# Altium PCB PM-1_PBD.PcbDoc
Units mm, origin at the board's own origin, x right, y up, seen from the top; angles counter-clockwise.
Board outline 87 x 116 mm, 2 copper layers (Top Layer, Bottom Layer); 78 components, 20 nets, 139 pads, 499 vias.
Unrouted connection lines stored in the file: 26.
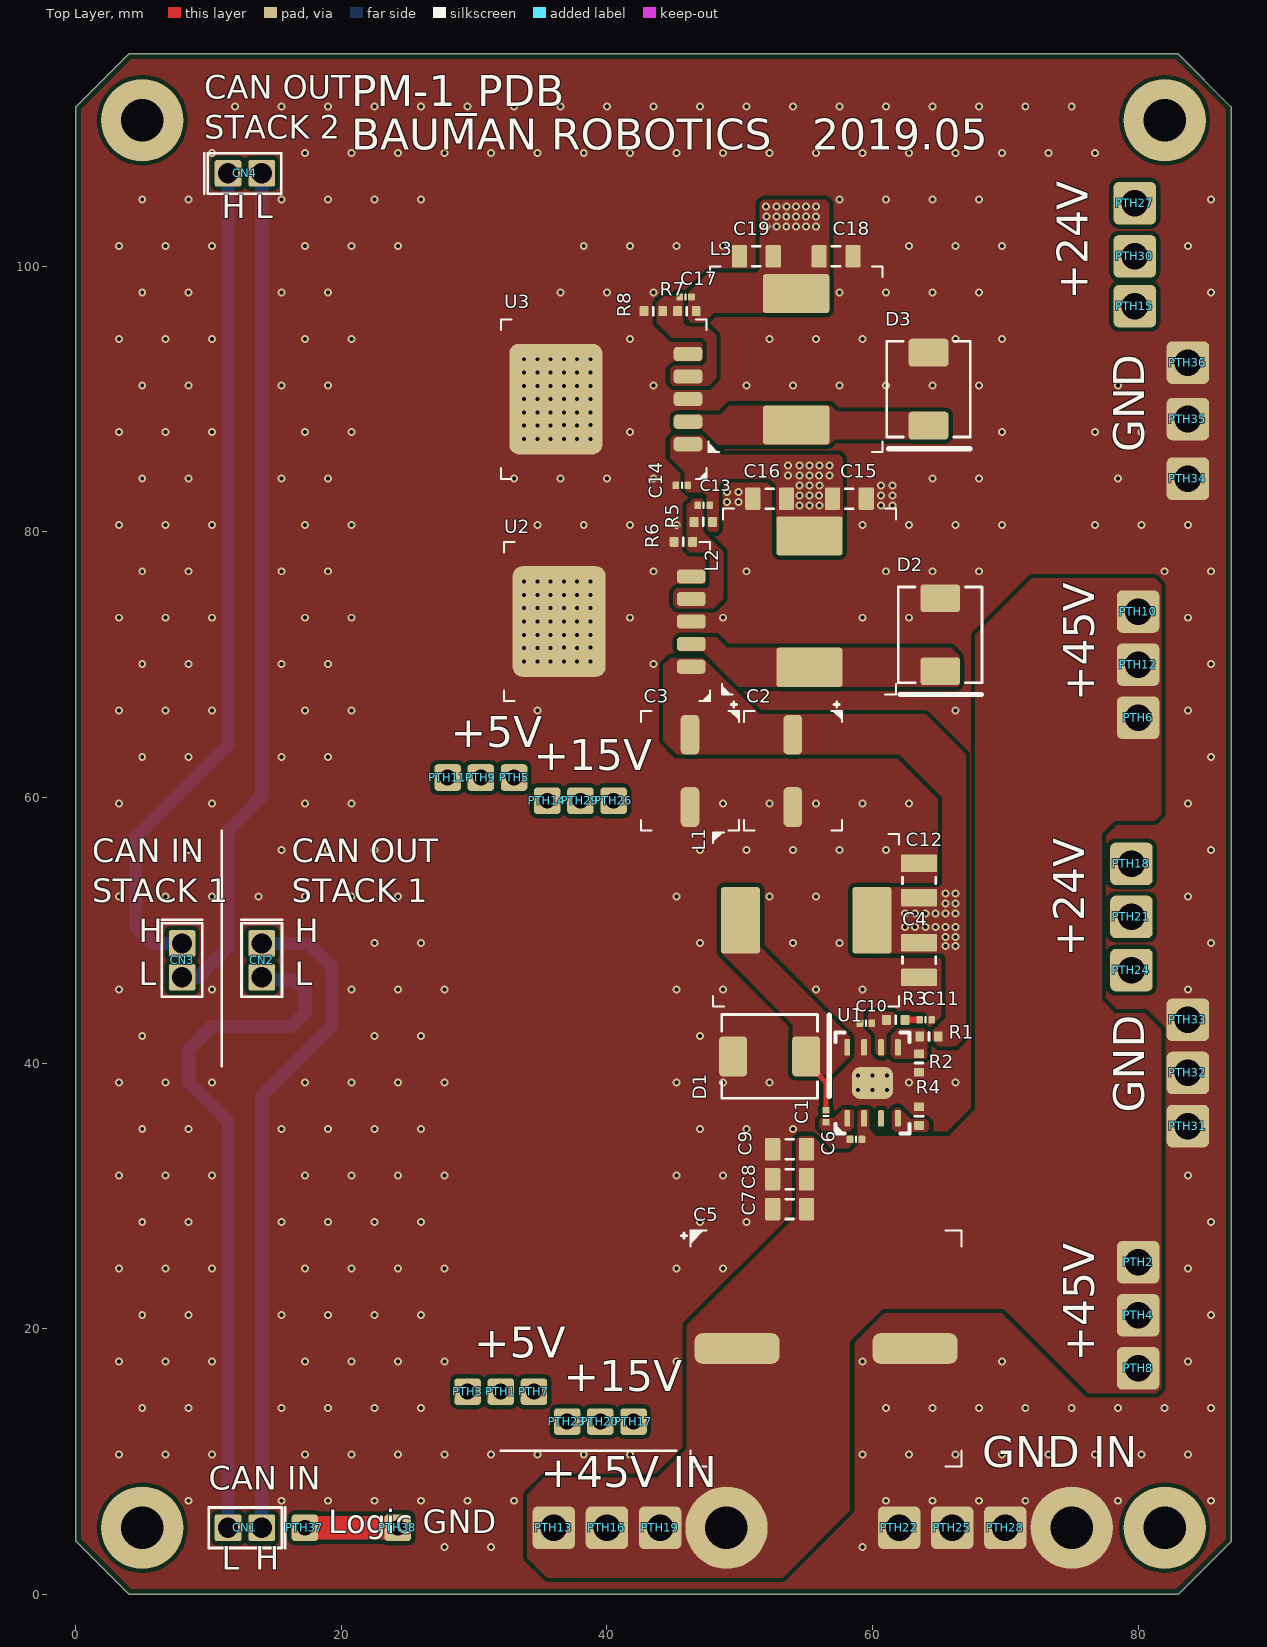
[diagram p0: Top Layer view]
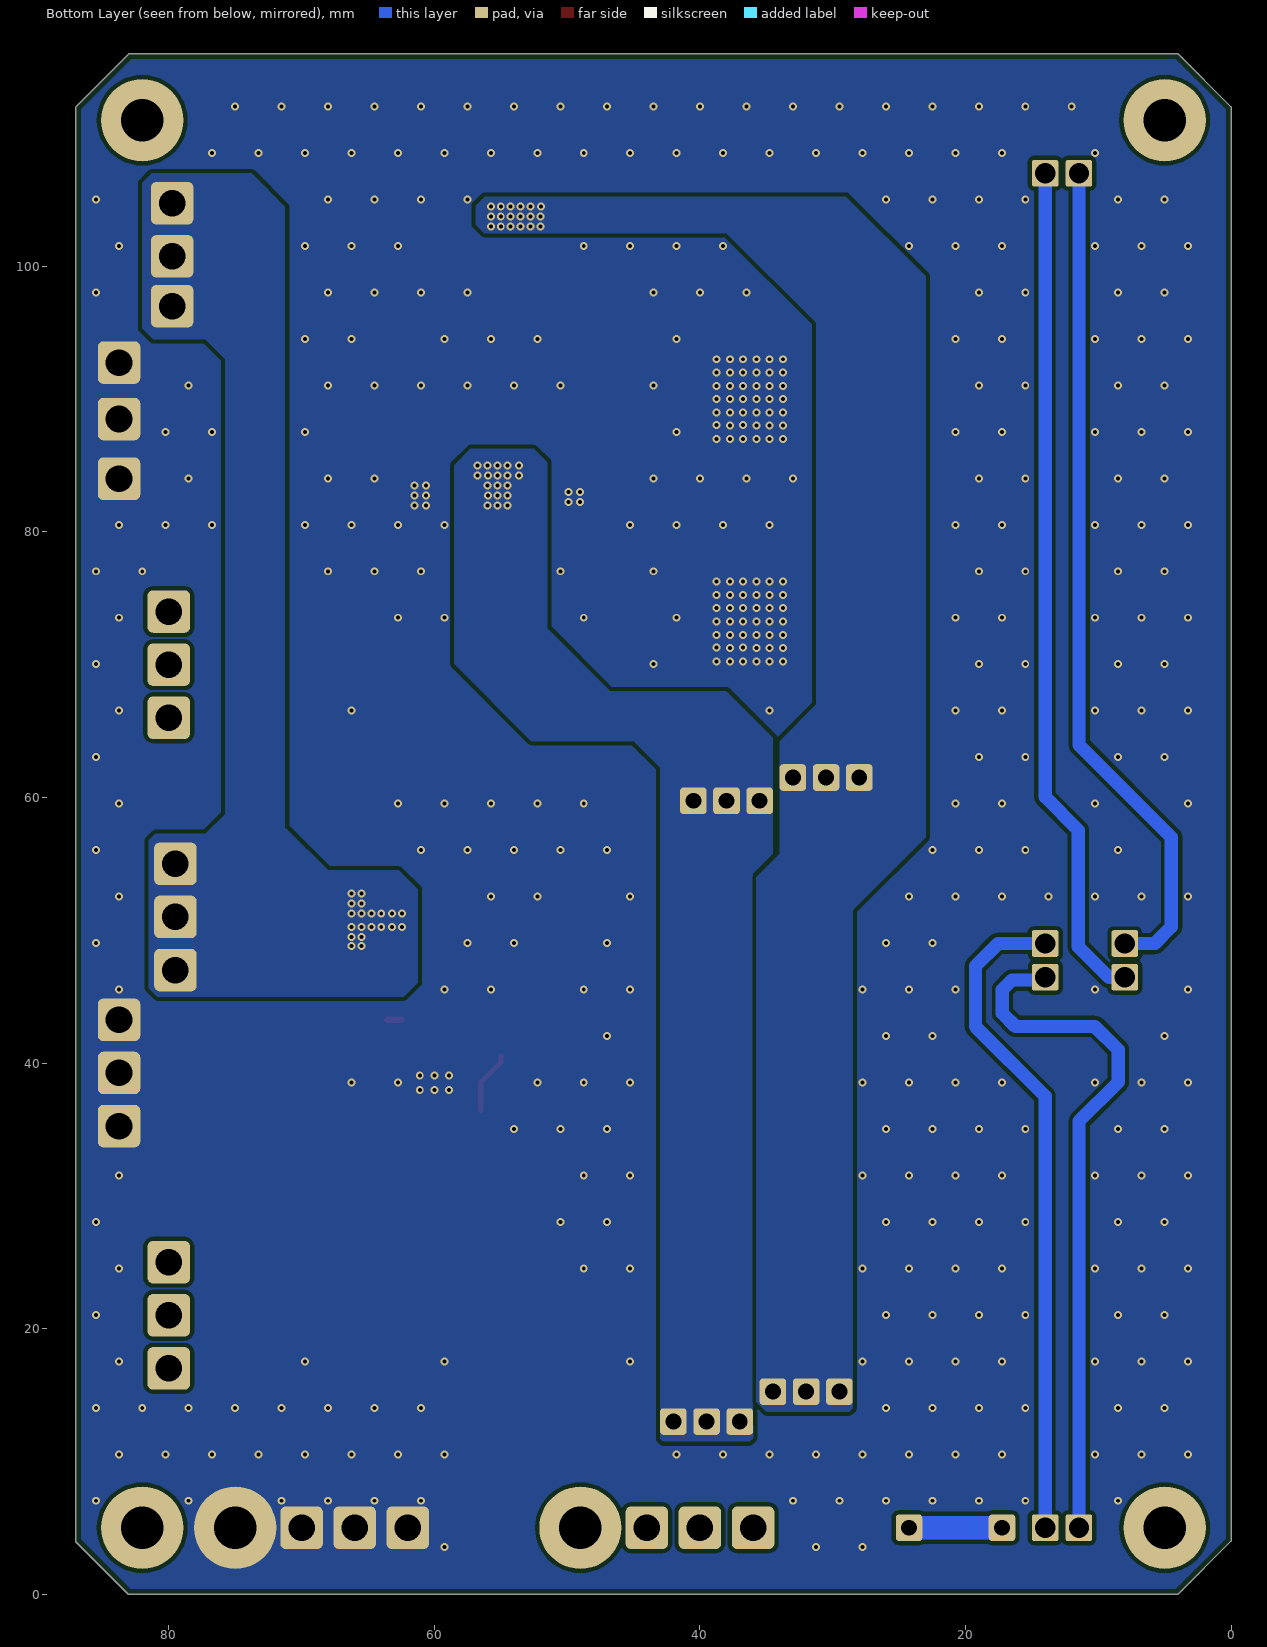
[diagram p1: Bottom Layer view, seen from below]
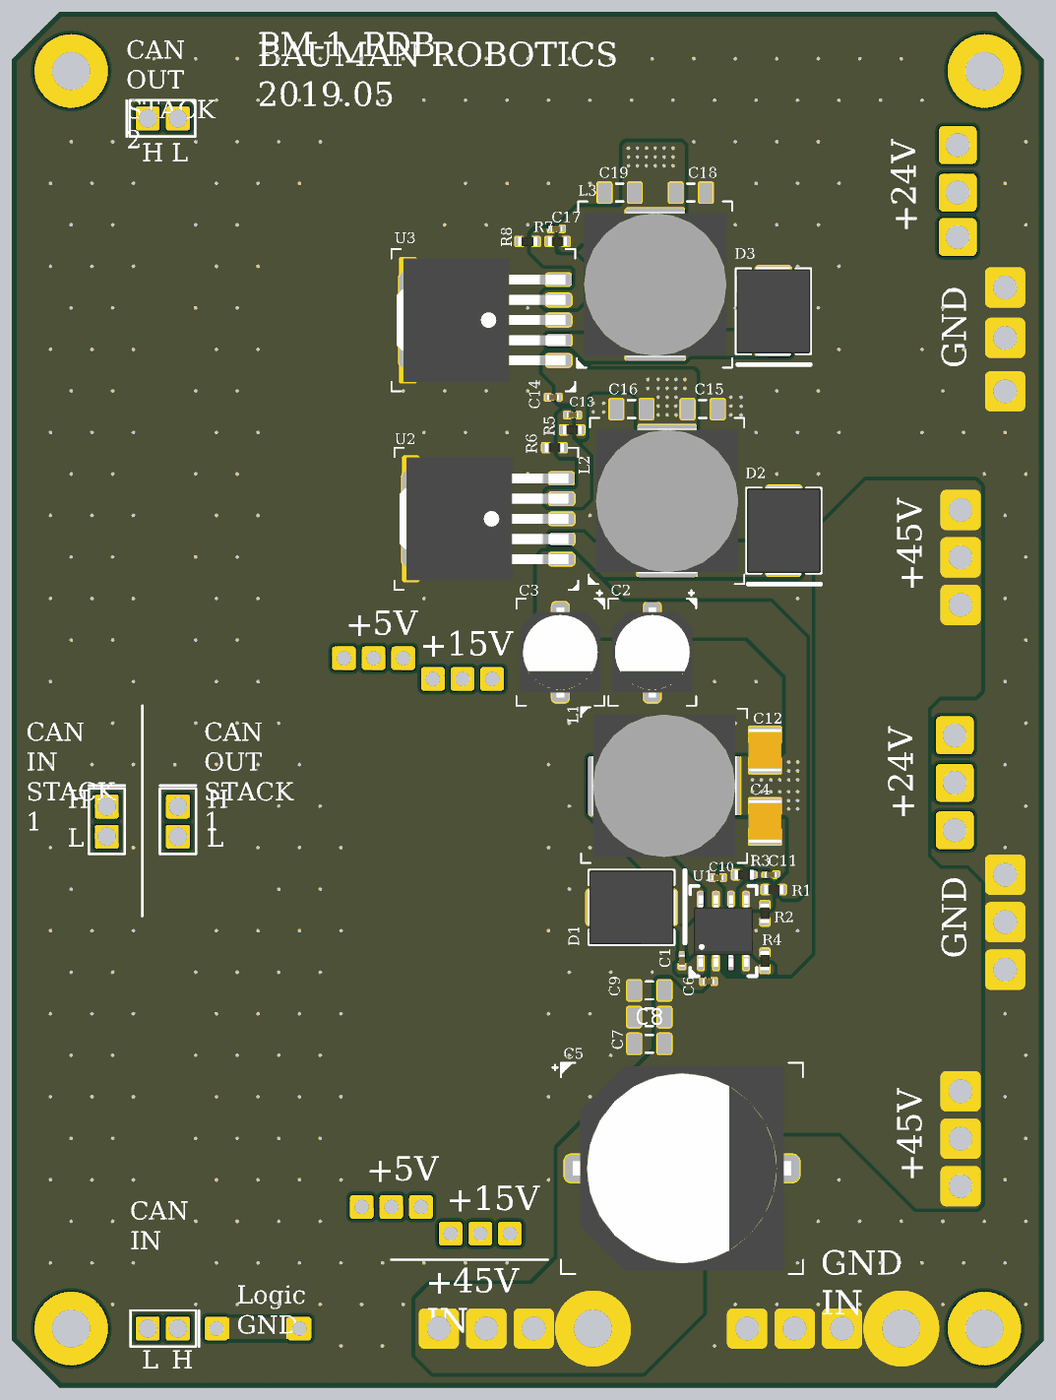
[diagram p2: 3D render of the assembled board from above, using the file's embedded part models]

## Layer stack, top to bottom
Top Solder: solder mask 0.0102, Solder Resist, Dk 3.5
Top Layer: signal copper 0.0356
Dielectric 1: dielectric 0.32, FR-4, Dk 4.8
Bottom Layer: signal copper 0.0356
Bottom Solder: solder mask 0.0102, Solder Resist, Dk 3.5

## Board outline
0,4 0,112 4,116 83,116 87,112 87,3.954 83.046,0 4,0

## Design rules (kind name [scope] priority, off if disabled: settings)
BoardOutlineClearance [All] p1: gap=0.4 ignorepadtopadclearanceinfootprint=FALSE except(0: Arc-SplitContinuation Track-SplitContinuation SMDPad-SplitContinuation THPad-SplitContinuation Via-SplitContinuation Fill-SplitContinuation Poly-SplitContinuation Region-SplitContinuation Text-SplitContinuation)
Clearance [All] p1: gap=0.3 ignorepadtopadclearanceinfootprint=FALSE except(0: Arc-Hole Track-Hole SMDPad-Hole THPad-Hole Via-Hole Fill-Hole Poly-Hole Region-Hole Text-Hole; 0.254: Arc-Text Track-Text SMDPad-Text THPad-Text Via-Text Fill-Text Poly-Text Region-Text Text-Text)
PolygonConnect [All] p1: connectstyle=Direct reliefconductorwidth=0.254 reliefentries=4 polygonreliefangle="90 Angle" airgapwidth=0.254
RoutingVias [All] p1: holewidth=0.3 width=0.6 viastyle="Through Hole" minholewidth=0.3 minwidth=0.6 maxholewidth=0.711 maxwidth=1.27
SolderMaskExpansion [All] p1: expansion=0.102
Width [All] p1: maxlimit=55 minlimit=0.2 preferedwidth=0.254 minimp=50.000000 maximp=50.000000 favimp=50.000000
30 further rules are at their usual default settings.

## Components (designator, comment, footprint, x,y, rotation, side; value= is the part's Value field where it differs from the comment)
C1 "SC100N100V4KX" CAPC0402(1005)60_L 56.5,36 r90 top
C2 "SA100U35VD8K" CAPAE(D8)7666X80L 54,62 r270 top
C3 "SA100U35VD8K" CAPAE(D8)7666X80L 46.25,62 r270 top
C4 "SC10U50V0KX" CAPC3225X27L 63.5,47.75 r90 top
C5 "SA470U63VJ16K" CAPAE184170X170L 56.5,18.5 r0 top
C6 "SC100N100V4KX" CAPC0402(1005)60_L 58.75,34.25 r0 top
C7 "SC1U100V6KX" CAPC1206(3216) 53.75,29 r0 top
C8 "SC1U100V6KX" CAPC1206(3216) 53.75,31.25 r0 top
C9 "SC1U100V6KX" CAPC1206(3216) 53.75,33.5 r0 top
C10 "SC1P50V2KX" CAPC0402(1005)60_L 59.5,43 r0 top
C11 "SCD68N50V2KX" CAPC0402(1005)60_L 64,43.25 r180 top
C12 "SC10U50V0KX" CAPC3225X27L 63.5,53.75 r270 top
C13 "SCD68N50V2KX" CAPC0402(1005)60_L 47.284,82 r0 top
C14 "SC100N100V4KX" CAPC0402(1005)60_L 45.638,83.5 r0 top
C15 "SC22U25V6KX" CAPC1206(3216) 58.25,82.5 r180 top
C16 "SC22U25V6KX" CAPC1206(3216) 52.25,82.5 r0 top
C17 "SCD68N50V2KX" CAPC0402(1005)60_L 45.917,97.687 r0 top
C18 "SC47U10V6KX" CAPC1206(3216) 57.25,100.75 r180 top
C19 "SC47U10V6KX" CAPC1206(3216) 51.25,100.75 r0 top
CN1 "2 18awg wires" 2PHEADERS-2D54 14,5 r180 top
CN2 "2 18awg wires" 2PHEADERS-2D54 14,49 r270 top
CN3 "2 18awg wires" 2PHEADERS-2D54 8,49 r270 top
CN4 "2 18awg wires" 2PHEADERS-2D54 11.46,107 r0 top
D1 "B560C-13-F" SMC 52.25,40.5 r180 top
D2 "B560C-13-F" SMC 65.096,72.25 r90 top
D3 "B560C-13-F" SMC 64.216,90.75 r90 top
L1 "CDRH127/LDNP-180MC" INDP120120X80L 55,50.75 r0 top
L2 "IND470U5A" INDP120120X80L 55.25,74.75 r90 top
L3 "IND470U5A" INDP120120X80L 54.25,93 r90 top
PTH1 "+5Vout" POWERHOLE-LP 32,15.25 r0 top
PTH2 "+45Vout" POWERHOLE 80,25 r90 top
PTH3 "+5Vout" POWERHOLE-LP 29.5,15.25 r0 top
PTH4 "+45Vout" POWERHOLE 80,21 r90 top
PTH5 "+5Vout" POWERHOLE-LP 33,61.5 r0 top
PTH6 "+45Vout" POWERHOLE 80,66 r90 top
PTH7 "+5Vout" POWERHOLE-LP 34.5,15.25 r0 top
PTH8 "+45Vout" POWERHOLE 80,17 r90 top
PTH9 "+5Vout" POWERHOLE-LP 30.5,61.5 r0 top
PTH10 "+45Vout" POWERHOLE 80,74 r90 top
PTH11 "+5Vout" POWERHOLE-LP 28,61.5 r0 top
PTH12 "+45Vout" POWERHOLE 80,70 r90 top
PTH13 "+45Vin" POWERHOLE 36,5 r0 top
PTH14 "+15Vout" POWERHOLE-LP 35.5,59.75 r0 top
PTH15 "+24Vout" POWERHOLE 79.75,97 r90 top
PTH16 "+45Vin" POWERHOLE 40,5 r0 top
PTH17 "+15Vout" POWERHOLE-LP 42,13 r0 top
PTH18 "+24Vout" POWERHOLE 79.5,55 r90 top
PTH19 "+45Vin" POWERHOLE 44,5 r0 top
PTH20 "+15Vout" POWERHOLE-LP 39.5,13 r0 top
PTH21 "+24Vout" POWERHOLE 79.5,51 r90 top
PTH22 "GNDVin" POWERHOLE 62,5 r0 top
PTH23 "+15Vout" POWERHOLE-LP 37,13 r0 top
PTH24 "+24Vout" POWERHOLE 79.5,47 r90 top
PTH25 "GNDVin" POWERHOLE 66,5 r0 top
PTH26 "+15Vout" POWERHOLE-LP 40.5,59.75 r0 top
PTH27 "+24Vout" POWERHOLE 79.75,104.75 r90 top
PTH28 "GNDVin" POWERHOLE 70,5 r0 top
PTH29 "+15Vout" POWERHOLE-LP 38,59.75 r0 top
PTH30 "+24Vout" POWERHOLE 79.75,100.75 r90 top
PTH31 "GNDout" POWERHOLE 83.75,35.25 r90 top
PTH32 "GNDout" POWERHOLE 83.75,39.25 r90 top
PTH33 "GNDout" POWERHOLE 83.75,43.25 r90 top
PTH34 "GNDout" POWERHOLE 83.75,84 r90 top
PTH35 "GNDout" POWERHOLE 83.75,88.5 r90 top
PTH36 "GNDout" POWERHOLE 83.75,92.75 r90 top
PTH37 "LGND" POWERHOLE-LP 17.25,5 r0 top
PTH38 "LGND" POWERHOLE-LP 24.25,5 r0 top
R1 "53D5KR3F" RESC0603(1608)_L 64.25,42 r0 top
R2 "18D7KR3F" RESC0603(1608)_L 63.5,40 r90 top
R3 "105KR3J" RESC0603(1608)_L 61.75,43.25 r180 top
R4 "140KR3J" RESC0603(1608)_L 63.5,36 r270 top
R5 "11D3KR3J" RESC0603(1608)_L 47.25,80.75 r0 top
R6 "1KR3F" RESC0603(1608)_L 45.75,79.25 r0 top
R7 "11D3KR3J" RESC0603(1608)_L 46.014,96.625 r0 top
R8 "1KR3F" RESC0603(1608)_L 43.491,96.625 r0 top
U1 "TPS54360" POWERSO8 60,38.5 r90 top
U2 "LM2596" D2PAK 40.25,73.25 r180 top
U3 "LM2596" D2PAK 40,90 r180 top

## Footprints (in the part's own frame and the unit in brackets; to place one, negate y for a bottom-side part, rotate by r counter-clockwise, add the part's x,y. Pads: shape width x height; smd on the part's side, far side on the other; paste and mask are expansions set on the pad)
2PHEADERS-2D54 [mm]
  rrect15% 2x2 hole 1.524: 1(0,0) 2(2.54,0)
  silkscreen extent -1.78,-1.52 4,1.52
CAPAE184170X170L [mm] "Aluminum Electrolytic Capacitor, Body 17,00x17,00x17,00mm, IPC High Density"
  rrect50% 6.4x2.3 smd: 1(-6.7,0) 2(6.7,0)
  silkscreen extent -10.9,-8.9 10.2,8.9, body extent -9.2,-8.6 9.2,8.6, height 17
CAPAE(D8)7666X80L [mm] "Aluminum Electrolytic Capacitor, Body 6,60x6,60x8,00mm, IPC High Density"
  rrect50% 3x1.4 smd: 1(-2.725,0) 2(2.725,0)
  silkscreen extent -5.2,-3.7 4.5,3.7, body extent -3.8,-3.4 3.8,3.4, height 8
CAPC0402(1005)60_L [mm]
  rrect25% 0.5x0.55 smd: 1(-0.45,0) 2(0.45,0)
  silkscreen extent 0,-0.2 0,0.2, body extent -0.5,-0.25 0.5,0.25, height 0.6
CAPC1206(3216) [mm] "Chip Capacitor, 2-Leads, Body 3,20x1,60mm, IPC High Density"
  rrect20% 1.15x1.7 smd: 1(-1.275,0) 2(1.275,0)
  silkscreen extent -0.3,-0.75 0.3,0.75, body extent -1.7,-0.9 1.7,0.9, height 1.6
CAPC3225X27L [mm] "Chip Capacitor, 2-Leads, Body 3,20x2,50mm, IPC High Density"
  rrect10% 1.3x2.7 smd: 1(-1.3,0) 2(1.3,0)
  silkscreen extent -0.25,-1.25 0.25,1.25, body extent -1.8,-1.4 1.8,1.4, height 2.7
D2PAK [mm] "D2-PAK, 6-Pads, Body 7,55x8,57mm (max), IPC High Density"
  rrect50% 2.16x1.07 smd: 1(-6.1,3.4) 2(-6.1,1.7) 3(-6.1,0) 4(-6.1,-1.7) 5(-6.1,-3.4)
  rrect20% 7x8.33 smd: 6(3.85,0)
  silkscreen extent -7.5,-6 8,6, body extent -6.68,-5.2 7.54,5.2, height 4.75
INDP120120X80L [mm] "Precision Wire Wound Inductor, 2-Leads, Body 12,00x12,00mm, IPC High Density"
  rrect15% 2.95x5 smd: 1(-4.95,0) 2(4.95,0)
  silkscreen extent -7,-6.5 7,6.6, body extent -6.1,-6 6.1,6, height 8.1
POWERHOLE [mm]
  rrect25% 3.2x3.2 hole 2: 1(0,0)
POWERHOLE-LP [mm]
  rrect25% 2x2 hole 1.2: 1(0,0)
POWERSO8 [mm] "SOIC, 8-Leads, Body 4,90x3,90mm, Pitch 1,27mm, Thermal Pad 3,10x2,40mm, IPC High Density"
  rrect50% 1.25x0.45 smd: 1(-2.675,1.905) 2(-2.675,0.635) 3(-2.675,-0.635) 4(-2.675,-1.905) 5(2.675,-1.905) 6(2.675,-0.635) 7(2.675,0.635) 8(2.675,1.905)
  rrect50% 2.4x3.1 smd: 9(0,0)
  silkscreen extent -3.8,-2.8 3.8,2.8, body extent -3,-2.5 3,2.5, height 1.7
RESC0603(1608)_L [mm]
  rrect25% 0.66x0.76 smd: 1(-0.7,0) 2(0.7,0)
  silkscreen extent 0,-0.3 0,0.3, body extent -0.8,-0.4 0.8,0.4, height 0.45
SMC [mm] "Molded Diode, 2-Leads, Body 6,86x5,91mm, IPC High Density"
  rrect25% 2.1x3 smd: 1(-2.75,0) 2(2.75,0)
  silkscreen extent -4.5,-3.15 3.6,3.15, body extent -3.77,-3.11 3.77,3.11, height 2.5

## Part data
C1 C6 C14: library part CAP(0805)100nF100V, "CAP 100nF 100V ±10% 0805(1610 Metric) Thickness 1mm SMD"
C2 C3: library part CAP(D8)100UF35V, "CAP 100uF 35V ±10% D8 Thickness 7.7mm SMD"
C4 C12: library part CAP(1210)10UF50V, "CAP 10uF 50V ±10% 1210(3225 Metric) Thickness 1.7mm SMD"
C5: library part CAP(J16)470UF63V, "EEVFK1J471M CAP 470uF 63V ±10% J16 Thickness 17mm SMD"
C7 C8 C9: library part CAP(1206)1UF100V, "CAP 1uF 100V ±10% 1206(3216 Metric) Thickness 1.8mm SMD"
C10: library part CAP(0402)1pF50V, "CAP 1pF 50V ±10% 0402 (1005 Metric) Thickness 0.6mm SMD"
C11 C13 C17: library part CAP(0402)680pF50V, "CAP 680pF 50V ±10% 0402 (1005 Metric) Thickness 0.6mm SMD"
C15 C16: library part CAP(1206)22UF25V, "CAP 22uF 25V ±10% 1206(3216 Metric) Thickness 1.8mm SMD"
C18 C19: library part CAP(1206)47UF10V, "CAP 47uF 10V ±10% 1206(3216 Metric) Thickness 1.8mm SMD"
CN1 CN2 CN3 CN4: library part 2PIN-CN, "2 holes for 18awg wire", Manufacturer=JST, Package Reference=JST-BM04B-GHS-TBT, Datasheet URL=http://www.jst-mfg.com/product/pdf/eng/eGH.pdf
D1 D2 D3: library part DIOD-B560C, "5.0A SURFACE MOUNT SCHOTTKY BARRIER RECTIFIER", Manufacturer=Rohm, Package Reference=ROHM-1SS400CSFH, Datasheet URL=https://www.rohm.com/datasheet/1SS400CSFH/1ss400csfht2ra-e
L1: library part CDRH127, "Inductor: SMD, 18 uHn, 5.1 A"
L2 L3: "Inductor: SMD, 47 uHn, 5 A"
PTH1 PTH3 PTH5 PTH7 PTH9 PTH11 PTH14 PTH17 PTH20 PTH23 PTH26 PTH29 PTH37 PTH38: library part PTH-1D2M, "1.2mm hole 2mm pad", Hole diameter (mm)=2.5, Pad diameter (mm)=5
PTH2 PTH4 PTH6 PTH8 PTH10 PTH12 PTH13 PTH15 PTH16 PTH18 PTH19 PTH21 PTH22 PTH24 PTH25 PTH27 PTH28 PTH30 PTH31 PTH32 PTH33 PTH34 PTH35 PTH36: library part PTH-2M, "2mm hole 3.5mm pad", Hole diameter (mm)=2.5, Pad diameter (mm)=5
R1: library part RES0(0603)_53D5K, "53.5K 0.1W 1% 0603 (1608 Metric)  SMD"
R2: library part RES0(0603)_1D8K, "18.7K 0.1W 1% 0603 (1608 Metric)  SMD"
R3: library part RES0(0603)_105K, "105K 0.1W 5% 0603 (1608 Metric)  SMD"
R4: library part RES0(0603)_140K, "140K 0.1W 5% 0603 (1608 Metric)  SMD"
R5 R7: library part RES0(0603)_11D3K, "11.3K 0.1W 5% 0603 (1608 Metric)  SMD"
R6 R8: library part RES0(0603)_1K, "1K 0.1W 1% 0603 (1608 Metric)  SMD"
U1: "60 V Input, 3.5 A, Step Down DC-DC Converter"
U2 U3: "4 V Input, 3 A, Step Down DC-DC Converter"

## Free pads (board coordinates)
  round 6.2 hole 3.2: 1(49,5) 2(5,5) 2(5,111) 2(75,5) 2(82,5) 2(82,111)

## Via types
v1: diameter 0.6, hole 0.3, Top Layer to Bottom Layer, tented both sides, 342 vias
v2: diameter 0.6/0.6 (per signal layer), hole 0.3, Top Layer to Bottom Layer, tented both sides, 151 vias
v3: diameter 0.6, hole 0.3, Top Layer to Bottom Layer, 6 vias

## Nets (pads, with @x,y where several pads share a name; then routed paths per layer and width w, separated by ;. In a path a pad name is that pad's centre, name@x,y a point inside that pad or via, vN(x,y) a via of type N, cw(c..) or ccw(c..) an arc to the next point about the centre after c; other vN are vias at no path point)
+5V: C17.2 C18.2 C19.2 L3.2 PTH1.1 PTH3.1 PTH5.1 PTH7.1 PTH9.1 PTH11.1 R7.2
  other v2: 52,103 52.75,103 53.5,103 54.25,103 55,103 55.75,103 52,103.75 52.75,103.75 53.5,103.75 54.25,103.75 55,103.75 55.75,103.75 51.975,104.5 52.75,104.5 53.525,104.5 54.25,104.5 55,104.5 55.75,104.5
+15V: C13.2 C14.2 C15.2 C16.2 L2.2 PTH14.1 PTH17.1 PTH20.1 PTH23.1 PTH26.1 PTH29.1 R5.2 U3.1
  other v2: 54.5,82 55.25,82 56,82 54.5,82.75 55.25,82.75 55.975,82.75 54.5,83.5 55.25,83.5 56,83.5 53.625,84.25 54.5,84.25 55.25,84.25 55.975,84.25 56.75,84.25 53.625,85 54.5,85 55.25,85 56,85 56.75,85
+24V: C2.1 C3.1 C4.2 C12.2 L1.2 PTH15.1 PTH18.1 PTH21.1 PTH24.1 PTH27.1 PTH30.1 R1.2 U2.1
  other v2: 65.5,48.8 66.25,48.8 65.5,49.5 66.25,49.5 62.45,50.25 63.2,50.25 64,50.25 64.75,50.25 65.5,50.25 66.25,50.25 62.45,51.25 63.2,51.25 64,51.25 64.75,51.25 65.5,51.25 66.25,51.25 65.5,52 66.25,52 65.5,52.75 66.25,52.75
+45V: C5.1 C6.2 C7.2 C8.2 C9.2 pad.1 PTH2.1 PTH4.1 PTH6.1 PTH8.1 PTH10.1 PTH12.1 PTH13.1 PTH16.1 PTH19.1 U1.2
GND: C2.2 C3.2 C4.1 C5.2 C6.1 C7.1 C8.1 C9.1 C10.1 C11.1 C12.1 C14.1 C15.1 C16.1 C18.1 C19.1 D1.2 D2.2 D3.2 pad.2@75,5 PTH22.1 PTH25.1 PTH28.1 PTH31.1 PTH32.1 PTH33.1 PTH34.1 PTH35.1 PTH36.1 R2.1 R4.1 R6.1 R8.1 U1.7 U1.9 U2.3 U2.5 U2.6 U3.3 U3.5 U3.6 | length 0
  other v1: 27.75,3.534 31.25,3.534 59.25,3.534 8.5,7.034 15.5,7.034 19,7.034 22.5,7.034 26,7.034 29.5,7.034 33,7.034 61,7.034 64.5,7.034 68,7.034 71.5,7.034 78.5,7.034 85.5,7.034 3.25,10.534 6.75,10.534 10.25,10.534 17.25,10.534 20.75,10.534 24.25,10.534 27.75,10.534 31.25,10.534 34.75,10.534 38.25,10.534 41.75,10.534 59.25,10.534 62.75,10.534 66.25,10.534 69.75,10.534 73.25,10.534 76.75,10.534 80.25,10.534 83.75,10.534 5,14.034 8.5,14.034 15.5,14.034 19,14.034 22.5,14.034 26,14.034 61,14.034 64.5,14.034 68,14.034 71.5,14.034 75,14.034 78.5,14.034 82,14.034 85.5,14.034 3.25,17.534 6.75,17.534 10.25,17.534 17.25,17.534 20.75,17.534 24.25,17.534 27.75,17.534 45.25,17.534 59.25,17.534 69.75,17.534 83.75,17.534 5,21.034 8.5,21.034 15.5,21.034 19,21.034 22.5,21.034 26,21.034 85.5,21.034 3.25,24.534 6.75,24.534 10.25,24.534 17.25,24.534 20.75,24.534 24.25,24.534 27.75,24.534 45.25,24.534 48.75,24.534 83.75,24.534 5,28.034 8.5,28.034 15.5,28.034 19,28.034 22.5,28.034 26,28.034 47,28.034 50.5,28.034 85.5,28.034 3.25,31.534 6.75,31.534 10.25,31.534 17.25,31.534 20.75,31.534 24.25,31.534 27.75,31.534 45.25,31.534 48.75,31.534 83.75,31.534 5,35.034 8.5,35.034 15.5,35.034 19,35.034 22.5,35.034 26,35.034 47,35.034 50.5,35.034 54,35.034 3.25,38.534 6.75,38.534 10.25,38.534 17.25,38.534 20.75,38.534 24.25,38.534 27.75,38.534 45.25,38.534 48.75,38.534 52.25,38.534 62.75,38.534 66.25,38.534 5,42.034 22.5,42.034 26,42.034 47,42.034 3.25,45.534 10.25,45.534 20.75,45.534 24.25,45.534 27.75,45.534 45.25,45.534 48.75,45.534 55.75,45.534 59.25,45.534 83.75,45.534 22.5,49.034 26,49.034 47,49.034 54,49.034 57.5,49.034 85.5,49.034 3.25,52.534 6.75,52.534 10.25,52.534 13.75,52.534 17.25,52.534 20.75,52.534 24.25,52.534 45.25,52.534 52.25,52.534 55.75,52.534 83.75,52.534 8.5,56.034 15.5,56.034 19,56.034 22.5,56.034 47,56.034 50.5,56.034 54,56.034 57.5,56.034 61,56.034 85.5,56.034 3.25,59.534 10.25,59.534 17.25,59.534 20.75,59.534 48.75,59.534 52.25,59.534 55.75,59.534 59.25,59.534 62.75,59.534 83.75,59.534 5,63.034 8.5,63.034 15.5,63.034 19,63.034 85.5,63.034 3.25,66.534 6.75,66.534 10.25,66.534 17.25,66.534 20.75,66.534 34.75,66.534 66.25,66.534 83.75,66.534 5,70.034 8.5,70.034 15.5,70.034 19,70.034 43.5,70.034 85.5,70.034 3.25,73.534 6.75,73.534 10.25,73.534 17.25,73.534 20.75,73.534 41.75,73.534 48.75,73.534 59.25,73.534 62.75,73.534 83.75,73.534 5,77.034 8.5,77.034 15.5,77.034 19,77.034 43.5,77.034 50.5,77.034 61,77.034 64.5,77.034 68,77.034 82,77.034 85.5,77.034 3.25,80.534 6.75,80.534 10.25,80.534 17.25,80.534 20.75,80.534 34.75,80.534 38.25,80.534 41.75,80.534 45.25,80.534 59.25,80.534 62.75,80.534 66.25,80.534 69.75,80.534 76.75,80.534 80.25,80.534 83.75,80.534 5,84.034 8.5,84.034 15.5,84.034 19,84.034 33,84.034 36.5,84.034 40,84.034 43.5,84.034 64.5,84.034 68,84.034 78.5,84.034 3.25,87.534 6.75,87.534 10.25,87.534 17.25,87.534 20.75,87.534 41.75,87.534 69.75,87.534 76.75,87.534 80.25,87.534 5,91.034 8.5,91.034 15.5,91.034 19,91.034 43.5,91.034 50.5,91.034 54,91.034 57.5,91.034 61,91.034 64.5,91.034 68,91.034 78.5,91.034 3.25,94.534 6.75,94.534 10.25,94.534 17.25,94.534 20.75,94.534 41.75,94.534 52.25,94.534 55.75,94.534 59.25,94.534 66.25,94.534 69.75,94.534 5,98.034 8.5,98.034 15.5,98.034 19,98.034 36.5,98.034 40,98.034 43.5,98.034 57.5,98.034 61,98.034 64.5,98.034 68,98.034 85.5,98.034 3.25,101.534 6.75,101.534 10.25,101.534 17.25,101.534 20.75,101.534 24.25,101.534 38.25,101.534 41.75,101.534 45.25,101.534 48.75,101.534 62.75,101.534 66.25,101.534 69.75,101.534 83.75,101.534 5,105.034 8.5,105.034 15.5,105.034 19,105.034 22.5,105.034 26,105.034 57.5,105.034 61,105.034 64.5,105.034 68,105.034 85.5,105.034 10.25,108.534 17.25,108.534 20.75,108.534 24.25,108.534 27.75,108.534 31.25,108.534 34.75,108.534 38.25,108.534 41.75,108.534 45.25,108.534 48.75,108.534 52.25,108.534 55.75,108.534 59.25,108.534 62.75,108.534 66.25,108.534 69.75,108.534 73.25,108.534 76.75,108.534 12,112.034 15.5,112.034 19,112.034 22.5,112.034 26,112.034 29.5,112.034 33,112.034 36.5,112.034 40,112.034 43.5,112.034 47,112.034 50.5,112.034 54,112.034 57.5,112.034 61,112.034 64.5,112.034 68,112.034 71.5,112.034 75,112.034
  other v2: 33.75,70.25 34.75,70.25 35.75,70.25 36.75,70.25 37.75,70.25 38.75,70.25 33.75,71.25 34.75,71.25 35.75,71.25 37.75,71.25 36.75,71.282 38.75,71.282 33.75,72.227 34.75,72.25 35.75,72.227 36.75,72.227 37.75,72.227 38.75,72.25 33.75,73.25 34.75,73.25 35.75,73.25 36.75,73.25 37.75,73.25 38.75,73.25 33.75,74.25 34.75,74.25 35.75,74.25 36.75,74.25 37.75,74.25 38.75,74.25 33.75,75.25 34.75,75.25 35.75,75.25 36.75,75.25 37.75,75.25 38.75,75.25 33.75,76.25 34.75,76.25 35.75,76.25 36.75,76.25 37.75,76.25 38.75,76.25 60.625,82 61.5,82 49.025,82.25 49.9,82.25 60.625,82.75 61.5,82.75 49.025,83 49.9,83 60.625,83.5 61.5,83.5 33.75,87 34.75,87 35.75,87 36.75,87 37.75,87 38.75,87 33.75,88 34.75,88 35.75,88 37.75,88 36.75,88.032 38.75,88.032 33.75,88.977 35.75,88.977 36.75,88.977 37.75,88.977 34.75,89 38.75,89 33.75,90 34.75,90 35.75,90 36.75,90 37.75,90 38.75,90 33.75,91 34.75,91 35.75,91 36.75,91 37.75,91 38.75,91 33.75,92 34.75,92 35.75,92 36.75,92 37.75,92 38.75,92 33.75,93 34.75,93 35.75,93 36.75,93 37.75,93 38.75,93
  other v3: 58.9,37.95 60,37.95 61.1,37.95 58.9,39.05 60,39.05 61.1,39.05
NetC1_1: C1.1 U1.1
NetC1_2: C1.2 D1.1 L1.1 U1.8 | length 4.7
  Top Layer w0.4: D1.1 55,40.05 56.5,38.55 C1.2
NetC10_2: C10.2 R3.2 U1.6
NetC11_2: C11.2 R3.1 | length 1.1
  Top Layer w0.5: R3.1 C11.2
NetC13_1: C13.1 R5.1 R6.2 U2.4
NetC17_1: C17.1 R7.1 R8.2 U3.4
NetCN1_1: CN1.1 CN2.1 | length 50.4
  Bottom Layer w1: CN1.1 14,37.5 19.25,42.75 19.25,47.3 17.55,49 CN2.1
NetCN1_2: CN1.2 CN2.2 | length 52.5
  Bottom Layer w1: CN1.2 11.46,35.605 8.5,38.565 8.5,41 10.25,42.75 16.235,42.75 17.235,43.75 17.235,45.515 16.5,46.25 14.21,46.25 CN2.2
NetCN3_1: CN3.1 CN4.1 | length 63.7
  Bottom Layer w1: CN3.1 5.75,49 4.5,50.25 4.5,57 11.46,63.96 CN4.1
NetCN3_2: CN3.2 CN4.2 | length 63.7
  Bottom Layer w1: CN3.2 9.199,46.46 11.5,48.761 11.5,57.538 14,60.038 CN4.2
NetD2_1: D2.1 L2.1 U2.2
NetD3_1: D3.1 L3.1 U3.2
NetPTH37_1: PTH37.1 PTH38.1 | length 14
  Top Layer w1.8: PTH37.1 PTH38.1
  Bottom Layer w1.8: PTH37.1 PTH38.1
NetR1_1: R1.1 R2.2 U1.5
NetR4_2: R4.2 U1.4
pads on no net: U1.3

## Polygon pours and split planes (outlines as drawn)
+15V on Bottom Layer "+15V_L02_P001" (solid, pour order 1): 36,12.25 36,11.75 36.25,11.5 42.8,11.5 43,11.7 43,56.25 43,62.25 45,64.25 52.695,64.25 58.5,70.055 58.5,85.029 57.279,86.25 52.5,86.25 51.5,85.25 51.5,72.75 46.75,68 38.009,68 34.5,64.491 34.5,55.75 36.009,54.241 36.009,13.25
+5V on Bottom Layer "+5V_L02_P000" (solid, pour order 0): 35,13.75 35.75,14.5 35.75,54 34,55.75 34,64.25 31.25,67 31.25,95.75 38,102.5 56.25,102.5 56.895,103.145 56.895,104.564 56.209,105.25 29,105.25 23,99.25 23,57 28.5,51.5 28.5,14 28.75,13.75
+24V on Bottom Layer "+24V_L02_P002" (solid, pour order 2): 80.871,45 81.5,45.629 81.5,56.78 81.03,57.25 77.25,57.25 75.75,58.75 75.75,93 77.25,94.5 81.166,94.5 82,95.334 82,106.28 81.28,107 73.75,107 71.25,104.5 71.25,57.75 68,54.5 62.666,54.5 61.25,53.084 61.25,46.055 62.305,45
GND on Bottom Layer "GND_L02_P020" (solid, pour order 20): 4,0 83,0 87,4 87,112 83,116 4,116 0,112 0,4
GND on Top Layer "GND_L01_P046" (solid, pour order 46): 0,4 0,112 4,116 83,116 87,112 87,3.954 83.046,0 4,0
NetC17_1 on Top Layer "NONET_L01_P-001" (solid, pour order 44): 44.75,91.25 45,91 47.645,91 48.225,91.58 48.225,94.796 47.521,95.5 46,95.5 45.75,95.75 45.75,97.625 45.625,97.75 44.25,97.75 43.75,97.25 43.75,95.75 44.865,94.636 47.164,94.636 47.521,94.278 47.521,92.846 47.175,92.5 45,92.5 44.75,92.25
+5V on Top Layer "+5V_L01_P019" (solid, pour order 19): 48.05,96.5 47.3,95.75 46.364,95.75 46.113,96 46.113,97.979 47.635,99.5 51.25,99.5 51.5,99.75 51.5,104.741 51.759,105 56.475,105 56.75,104.725 56.75,96.75 56.5,96.5
GND on Top Layer "GND_L01_P018" (solid, pour order 18): 58.879,83.879 58.5,83.5 58.5,81.75 58.75,81.5 61.741,81.5 61.905,81.664 61.905,83.595 61.629,83.871
GND on Top Layer "NONET_L01_P-001" (solid, pour order 17): 48.65,83.25 49.15,83.75 52,83.75 52.25,83.5 52.25,81.775 51.975,81.5 48.937,81.5 48.65,81.788
NetR1_1 on Top Layer "NONET_L01_P-001" (solid, pour order 16): 61.337,40.619 61.625,40.331 63.956,40.331 64.125,40.5 64.125,42.346 63.897,42.575 61.844,42.575 61.337,42.069
NetC10_2 on Top Layer "NONET_L01_P-001" (solid, pour order 15): 60.219,40.781 60.5,40.5 60.85,40.5 61.05,40.7 61.05,42.184 61.625,42.759 61.625,43.745 61.5,43.87 59.812,43.87 59.656,43.714 59.656,42.744 60.219,42.181
NetC1_1 on Top Layer "NONET_L01_P-001" (solid, pour order 14): 58.483,36.5 58.6,36.383 58.6,35.175 58.3,34.875 56.25,34.875 55.975,35.15 55.975,35.716 56.084,35.825 57.075,35.825 57.75,36.5
NetR4_2 on Top Layer "NONET_L01_P-001" (solid, pour order 13): 61.75,36.625 61.5,36.375 61.5,35 61.75,34.75 64,34.75 64.25,35 64.25,35.55 64.05,35.75 62.875,35.75 62,36.625
+15V on Top Layer "+15V_L01_P011" (solid, pour order 11): 47.5,80.25 47.75,80 48.25,80 48.4,80.15 48.4,83.5 48.9,84 52.25,84 52.75,83.5 52.75,80.75 53,80.5 57.5,80.5 57.75,80.75 57.75,85.559 57.5,85.809 48.616,85.809 47.175,87.25 45,87.25 44.75,87 44.75,85.6 45.85,84.5 45.85,83.25 46.1,83 47.25,83 47.5,82.75
NetC13_1 on Top Layer "NETC13_1_L01_P010" (solid, pour order 10): 45,74.5 45.25,74.25 48.05,74.25 48.75,74.95 48.75,78.5 47.25,80 47.25,82.375 47.125,82.5 46.5,82.5 46,82 46,78.684 46.227,78.457 47.543,78.457 47.75,78.25 47.75,76 47.5,75.75 45.25,75.75 45,75.5
+45V on Top Layer "NONET_L01_P-001" (solid, pour order 9): 81.75,76 81.25,76.5 72,76.5 67.75,72.25 67.75,36.5 65.75,34.5 60.25,34.5 59.75,35 59.75,36.45 59.7,36.5 59.05,36.5 58.9,36.35 58.9,33.85 58.3,33.25 56.75,33.25 55.5,34.5 54.5,34.5 54.25,34.262 54.25,28.5 46,20.25 46,10.95 43.8,8.75 35.25,8.75 34,7.5 34,2.75 35.5,1.25 53.25,1.25 58.3,6.3 58.3,19.05 60.75,21.5 69.875,21.5 76.25,15.125 81.375,15.125 81.75,15.5 81.75,42.5 80.5,43.75 78.25,43.75 77.25,44.75 77.25,57.25 78.25,58.25 81.25,58.25 81.75,58.75
+24V on Top Layer "NONET_L01_P-001" (solid, pour order 8): 64.95,53 64.95,53.2 65.25,53.5 65.25,60 62,63.25 45.25,63.25 44.25,64.25 44.25,70 44.75,70.5 47.25,70.5 51.5,66.25 64,66.25 67,63.25 67,53
+24V on Top Layer "NONET_L01_P-001" (solid, pour order 7): 60.512,48.25 65.25,48.25 65.5,48 65.5,43.714 65.5,43.4 64.5,42.4 64.5,41.75 65,41.25 66.25,41.25 67,42 67,53 66.75,53.25 60.5,53.25 59.374,52.124 59.374,49.388
NetD3_1 on Top Layer "NETD3_1_L01_P005" (solid, pour order 5): 46.825,87.775 47.125,87.775 48.325,86.575 56.73,86.575 57.138,86.984 63.2,86.984 63.2,89.041 57.323,89.041 56.848,89.516 49.25,89.525 48.55,88.825 46.825,88.825
NetD2_1 on Top Layer "NONET_L01_P-001" (solid, pour order 4): 45.5,71.025 47.2,71.025 49.882,68.343 66.38,68.343 66.553,68.516 66.553,70.642 65.92,71.275 55.25,71.275 49.025,71.275 48.225,72.075 45.775,72.075
NetC1_2 on Top Layer "NONET_L01_P-001" (solid, pour order 3): 48.6,48.3 54,42.9 54,40.9 55.8,39.1 56.9,39.1 58.3,40.5 58.3,42 51.5,48.8 51.5,50.5 48.6,50.5

## Silkscreen, mask and mechanical layers (free items; w line width, h text height)
Top Overlay:
  lines w0.2: 11,39.75 11,57.5 ; 32,10.8 45.2,10.8
  text "PM-1_PDB" at 20.75,111.25 h4
  text "CAN OUT / STACK 2" at 9.682,109 h3
  text "BAUMAN ROBOTICS   2019.05" at 20.75,108 h4
  text "H" at 11,103 h3
  text "L" at 13.5,103 h3
  text "+24V" at 77,97.5 h4 r90
  text "GND" at 81.25,86 h4 r90
  text "+45V" at 77.5,67.25 h4 r90
  text "+5V" at 28.25,63 h4
  text "+15V" at 34.5,61.25 h4
  text "CAN IN / STACK 1" at 1.25,51.5 h3
  text "CAN OUT / STACK 1" at 16.25,51.5 h3
  text "H" at 4.75,48.5 h3
  text "H" at 16.5,48.5 h3
  text "+24V" at 76.75,48 h4 r90
  text "L" at 4.75,45.25 h3
  text "L" at 16.5,45.25 h3
  text "GND" at 81.25,36.25 h4 r90
  text "+45V" at 77.5,17.5 h4 r90
  text "+5V" at 30,17 h4
  text "+15V" at 36.75,14.5 h4
  text "GND IN" at 68.25,8.75 h4
  text "CAN IN" at 10,7.248 h3
  text "+45V IN" at 35,7.248 h4
  text "Logic GND" at 19,4 h3
  text "L" at 11,1.25 h3
  text "H" at 13.5,1.25 h3
Board outline:
  the board outline again, w0.2